# Altium PCB PCB3.PcbDoc
Units mm, origin at the board's own origin, x right, y up, seen from the top; angles counter-clockwise.
Board outline 63.5 x 33.5 mm, 2 copper layers (Top Layer, Bottom Layer); 44 components, 65 nets, 187 pads, 91 vias.
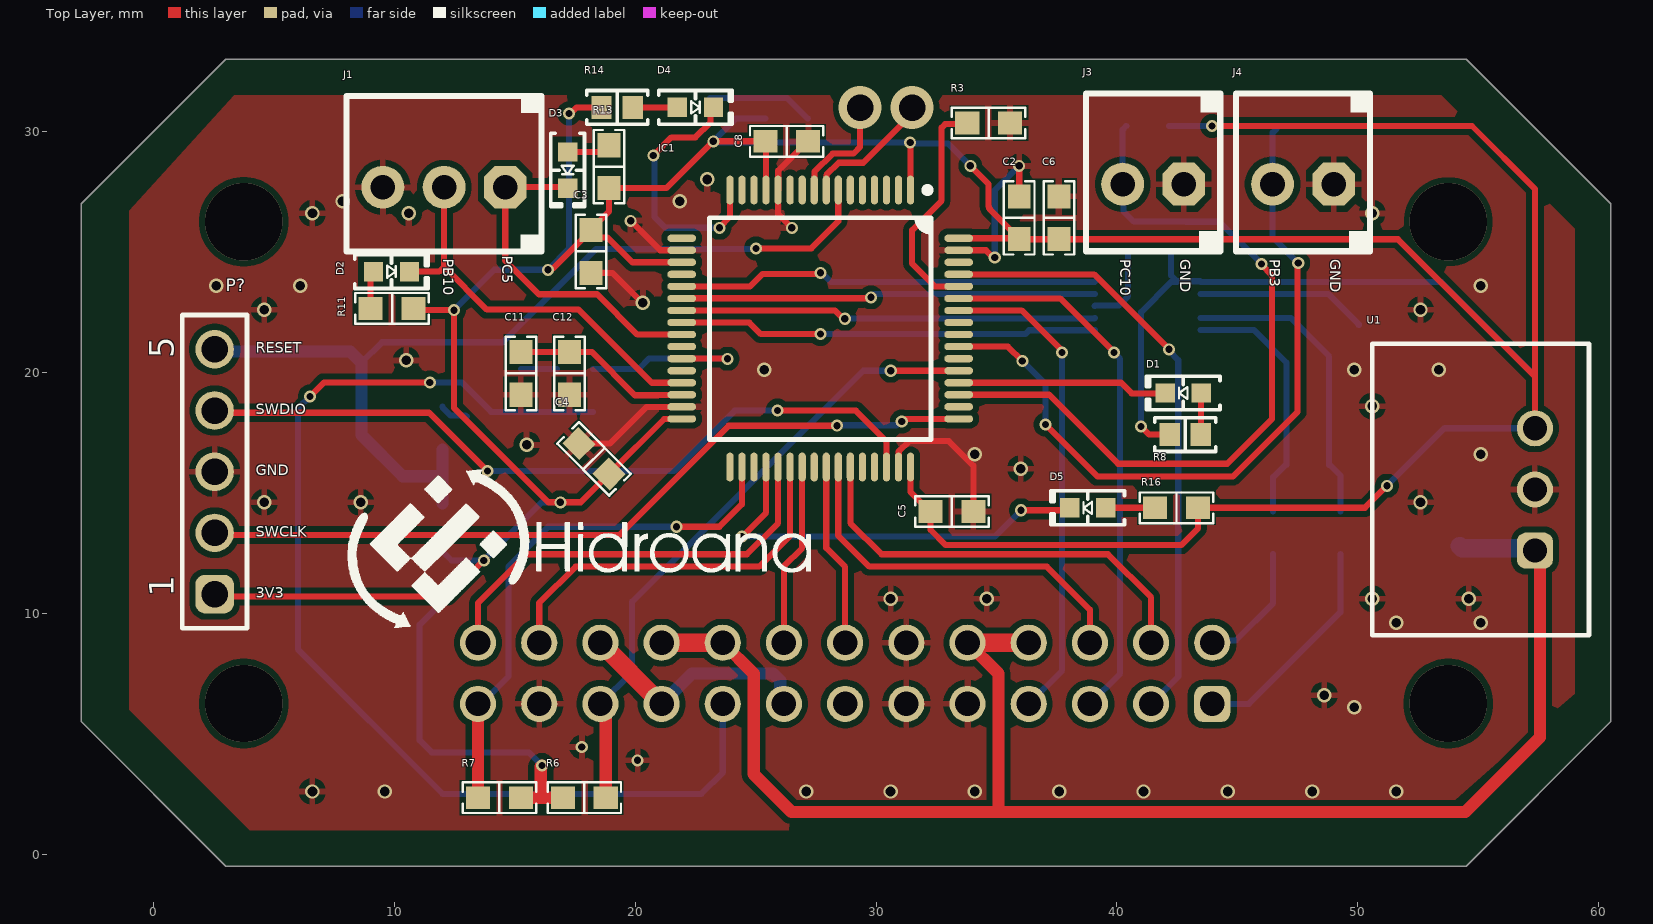
[diagram p0: Top Layer view]
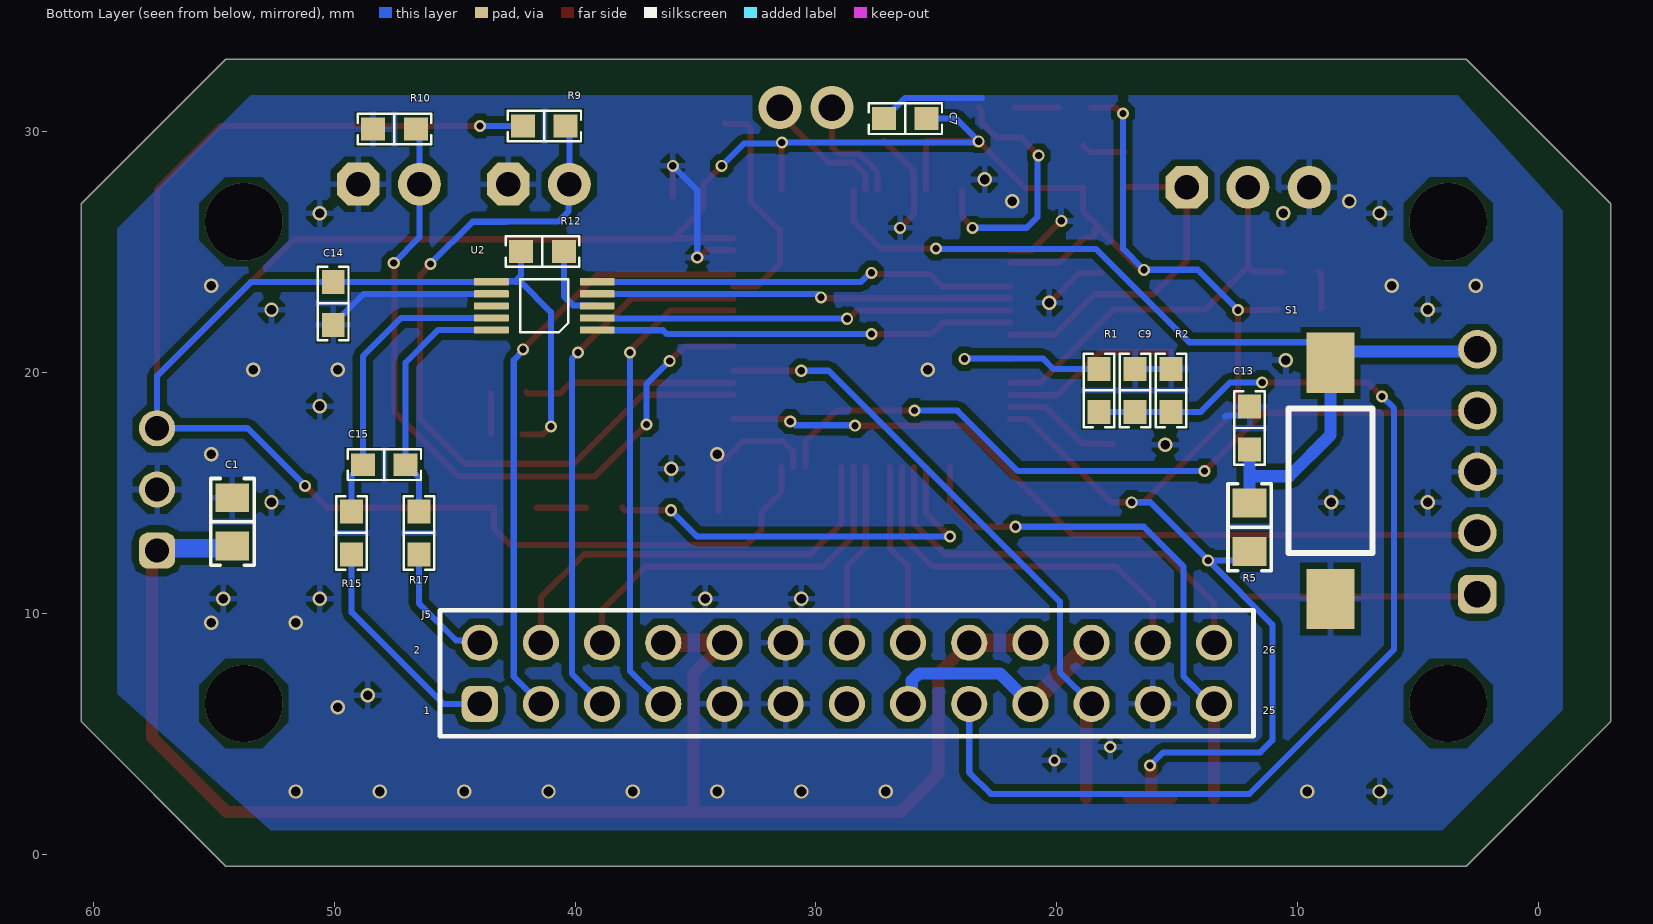
[diagram p1: Bottom Layer view, seen from below]
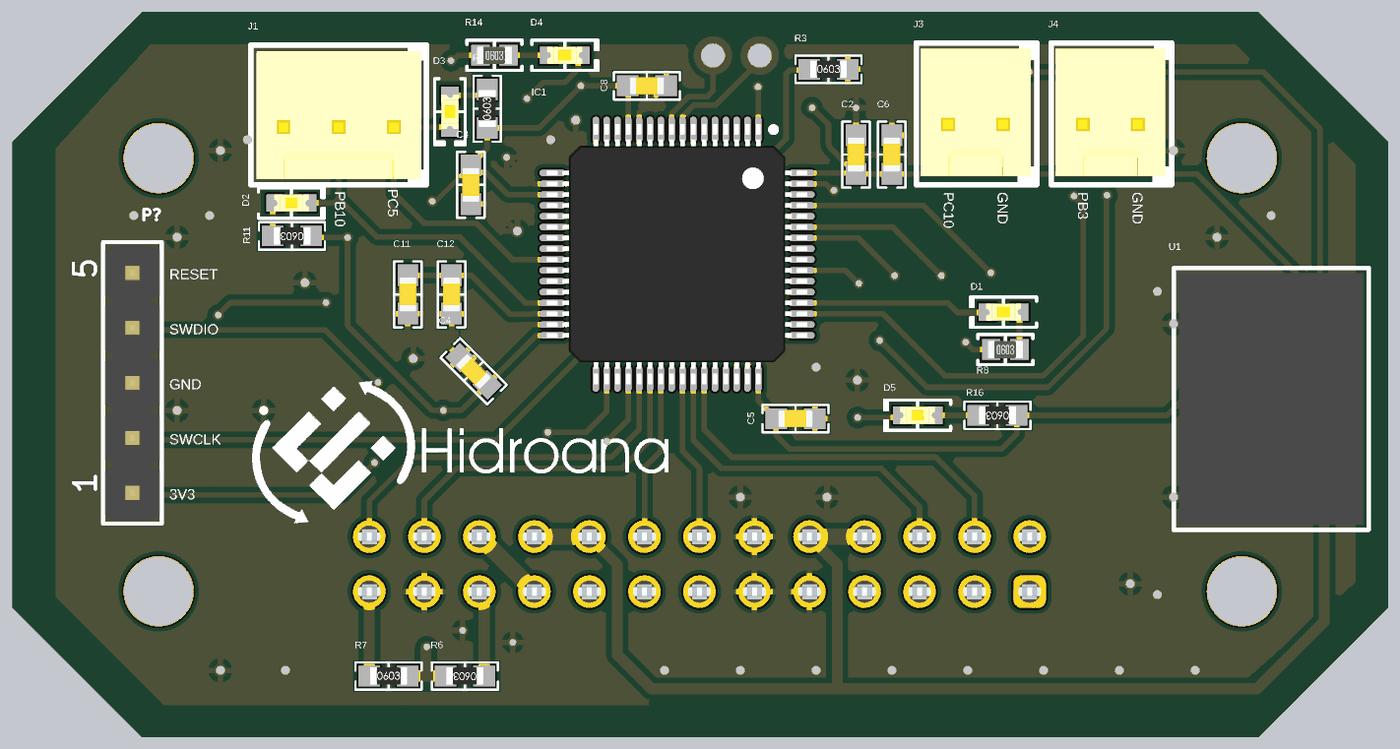
[diagram p2: 3D render of the assembled board from above, using the file's embedded part models]
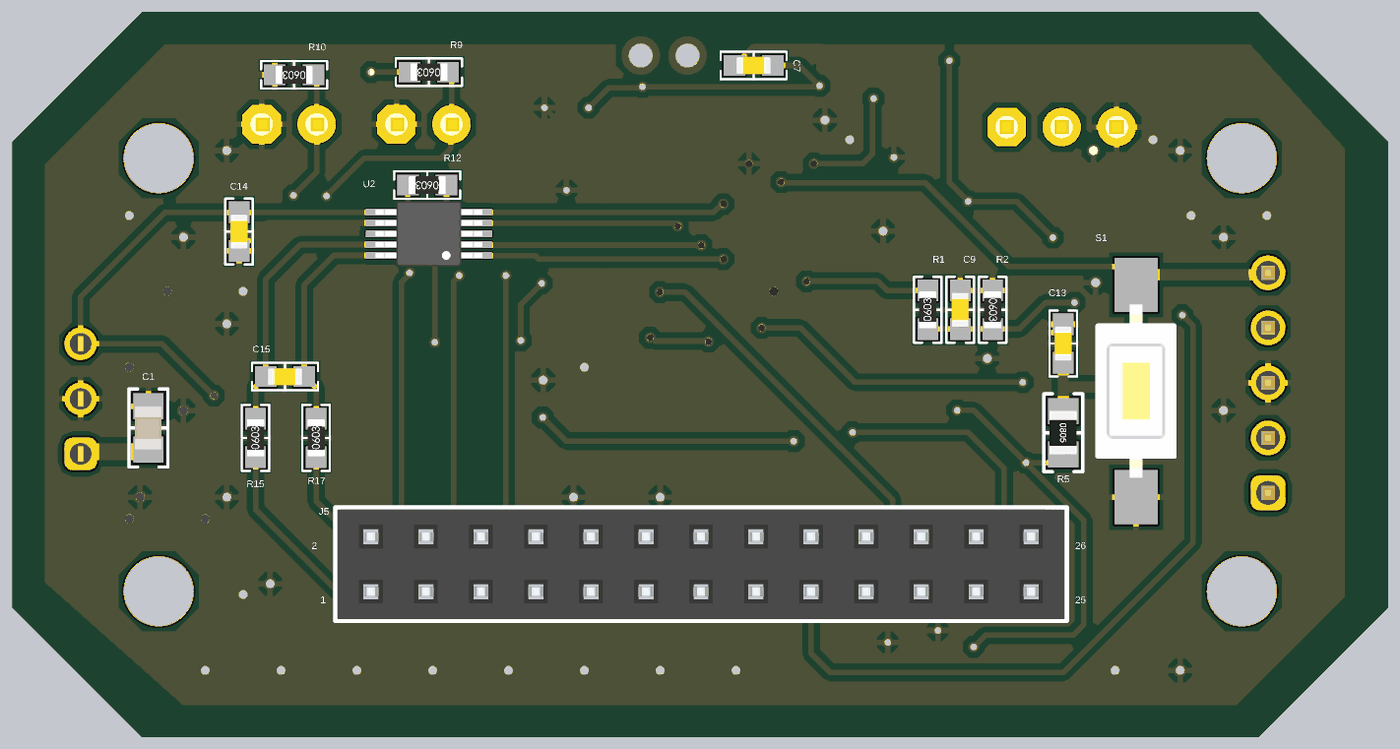
[diagram p3: 3D render of the assembled board from below, using the file's embedded part models]

## Layer stack, top to bottom
Top Solder: solder mask 0.0102, Solder Resist, Dk 3.5
Top Layer: signal copper 0.0356
Dielectric 1: dielectric 0.32, FR-4, Dk 4.8
Bottom Layer: signal copper 0.0356
Bottom Solder: solder mask 0.0102, Solder Resist, Dk 3.5

## Board outline
-3,5.5 -3,27 3,33 54.5,33 60.5,27 60.5,5.5 54.5,-0.5 3,-0.5

## Design rules (kind name [scope] priority, off if disabled: settings)
Clearance Clearance_1 [All] p1: gap=0.254 ignorepadtopadclearanceinfootprint=FALSE except(0: Arc-Hole Track-Hole SMDPad-Hole THPad-Hole Via-Hole Fill-Hole Poly-Hole Region-Hole Text-Hole; 0.127: Arc-Arc Arc-Track Arc-SMDPad Track-Track Track-SMDPad SMDPad-SMDPad)
Clearance [All] p2: gap=0.127 ignorepadtopadclearanceinfootprint=FALSE except(0: Arc-Hole Track-Hole SMDPad-Hole THPad-Hole Via-Hole Fill-Hole Poly-Hole Region-Hole Text-Hole)
PolygonConnect [All] p1: connectstyle=Relief reliefconductorwidth=0.254 reliefentries=4 polygonreliefangle="90 Angle" airgapwidth=0.254
RoutingVias [All] p1: holewidth=0.3 width=0.5 viastyle="Through Hole" minholewidth=0.25 minwidth=0.4 maxholewidth=0.5 maxwidth=1
SolderMaskExpansion [All] p1: expansion=0.102 istentingtop=FALSE
Width [All] p1: maxlimit=0.762 minlimit=0.254 preferedwidth=0.254 minimp=50.000000 maximp=50.000000 favimp=50.000000
30 further rules are at their usual default settings.

## Components (designator, comment, footprint, x,y, rotation, side; value= is the part's Value field where it differs from the comment)
C1 "100nF 16V" 0805_CAP 54.225,13.793 r270 bottom
C2 "4.7uF" 0603_CAP 35.941,26.416 r90 top value="1uF 16V"
C3 "100nF" 0603_CAP 18.161,25.019 r270 top value="1uF 16V"
C4 "100nF" 0603_CAP 18.288,16.411 r135 top value="1uF 16V"
C5 "100nF" 0603_CAP 33.147,14.224 r0 top value="1uF 16V"
C6 "100nF" 0603_CAP 37.592,26.416 r90 top value="1uF 16V"
C7 "10nF" 0603_CAP 26.289,30.531 r0 bottom value="1uF 16V"
C8 "1uF" 0603_CAP 26.289,29.591 r0 top value="1uF 16V"
C9 "10nF" 0603_CAP 16.75,19.25 r90 bottom value="100nF 16V"
C11 "2.2uF" 0603_CAP 15.252,19.957 r270 top value="1uF 16V"
C12 "2.2uF" 0603_CAP 17.272,19.957 r270 top value="1uF 16V"
C13 "100nF" 0603_CAP 11.995,17.69 r90 bottom value="1uF 16V"
C14 "100nF 16V" 0603_CAP 50.038,22.86 r90 bottom
C15 "100nF 16V" 0603_CAP 47.918,16.165 r0 bottom
D1 "Yellow" "LED 0603_1608 YELLOW" 42.75,19.141 r180 top
D2 "Yellow" "LED 0603_1608 YELLOW" 9.881,24.181 r0 top
D3 "Yellow" "LED 0603_1608 YELLOW" 17.196,28.397 r270 top
D4 "Yellow" "LED 0603_1608 YELLOW" 22.5,31 r0 top
D5 "Yellow" "LED 0603_1608 YELLOW" 38.786,14.376 r180 top
IC1 "STM32F446RET6" "ST LQFP-64 10X10MM" 27.68,21.818 r270 top
J1 "DS1070 3 Pin" 3pin_100mil 12.065,27.686 r180 top
J3 "DS1070 2 Pin" 2PIN_100mil 41.504,27.813 r180 top
J4 "DS1070 2 Pin" 2PIN_100mil 47.727,27.813 r180 top
J5 "61302621821" 61302621821 28.714,7.506 r180 bottom
P? "61300511121" 61300511121 2.54,15.875 r90 top
R1 "4.7K" 0603_RES 18.25,19.25 r90 bottom value="0/10 Ohms"
R2 "4.7K" 0603_RES 15.252,19.25 r270 bottom value="0/10 Ohms"
R3 "10K" 0603_RES 34.671,30.353 r0 top value="0/10 Ohms"
R5 "10k Ohms" 0805_RES 11.995,13.57 r270 bottom
R6 "4.7K" 0603_RES 17.886,2.34 r180 top value="0/10 Ohms"
R7 "4.7K" 0603_RES 14.363,2.34 r0 top value="0/10 Ohms"
R8 "10 kOhms" "RES 0603_1608" 42.835,17.414 r0 top
R9 "4.7K" 0603_RES 41.275,30.226 r0 bottom value="0/10 Ohms"
R10 "4.7K" 0603_RES 47.498,30.099 r0 bottom value="0/10 Ohms"
R11 "2k2" 0603_RES 9.906,22.657 r180 top value="0/10 Ohms"
R12 "10k Ohms" 0603_RES 41.353,25.011 r0 bottom
R13 "2k2" 0603_RES 18.917,28.536 r90 top value="0/10 Ohms"
R14 "10 kOhms" "RES 0603_1608" 19.25,31 r0 top
R15 "82 Ohms" 0603_RES 49.276,13.335 r90 bottom
R16 "2k2" 0603_RES 42.469,14.376 r180 top value="0/10 Ohms"
R17 "82 Ohms" 0603_RES 46.482,13.335 r90 bottom
S1 "DTSMF-31R-V-T/R" Button 8.636,15.494 r90 bottom
U1 "7-28Vin, 3.3Vout, 1Aout" WPME-FDSM_SIP-3_L11.6W8.5H10.5 55.1,15.137 r90 top
U2 "INA229" INA229 41.275,22.733 r0 bottom

## Footprints (in the part's own frame and the unit in brackets; to place one, negate y for a bottom-side part, rotate by r counter-clockwise, add the part's x,y. Pads: shape width x height; smd on the part's side, far side on the other; paste and mask are expansions set on the pad)
2PIN_100mil [mil]
  oct 70x70 hole 40.16 mask+1.97: 1(-50,0)
  round 70 hole 40.16 mask+1.97: 2(50,0)
  silkscreen extent -110,-148 110,110, body extent -98,-138 102,94, height 449
3pin_100mil [mil]
  oct 70x70 hole 40.16 mask+1.97: 1(-100,0)
  round 70 hole 40.16 mask+1.97: 2(0,0) 3(100,0)
  silkscreen extent -159,-151 160,108, body extent -150,-138 150,94, height 449
0603_CAP [mm]
  rect 1x0.95 smd mask+0.08: 1(-0.889,0) 2(0.889,0)
  silkscreen extent -1.52,-0.64 1.52,0.64, body extent -0.8,-0.4 0.8,0.4, height 0.96
0603_RES [mm]
  rect 1x0.95 smd mask+0.08: 1(-0.889,0) 2(0.889,0)
  silkscreen extent -1.52,-0.64 1.52,0.64, body extent -0.85,-0.4 0.85,0.4, height 0.56
0805_CAP [mm]
  rect 1.2x1.4 smd: 1(-1,0) 2(1,0)
  silkscreen extent -1.8,-0.9 1.8,0.9, body extent -1,-0.63 1,0.62, height 0.6
0805_RES [mm]
  rect 1.2x1.4 smd: 1(-1,0) 2(1,0)
  silkscreen extent -1.8,-0.9 1.8,0.9, body extent -1,-0.62 1,0.63, height 0.6
61300511121 [mm] "Pin Header, pitch 2.54 mm, THT, Vertical, single row, 5p"
  rrect50% 1.6x1.6 hole 1.1: 1(-5.08,0)
  round 1.6 hole 1.1: 2(-2.54,0) 3(0,0) 4(2.54,0) 5(5.08,0)
  silkscreen extent -6.5,-1.35 6.5,1.35, body extent -6.35,-1.27 6.35,1.27, height 8.57
61302621821 [mm] "Socket Header, Pitch 2.54 mm, THT, Vertical, dual row, 26p"
  rrect50% 1.5x1.5 hole 1.02: 1(-15.24,-1.27)
  round 1.5 hole 1.02: 2(-15.24,1.27) 3(-12.7,-1.27) 4(-12.7,1.27) 5(-10.16,-1.27) 6(-10.16,1.27) 7(-7.62,-1.27) 8(-7.62,1.27) 9(-5.08,-1.27) 10(-5.08,1.27) 11(-2.54,-1.27) 12(-2.54,1.27) 13(0,-1.27) 14(0,1.27) 15(2.54,-1.27) 16(2.54,1.27) 17(5.08,-1.27) 18(5.08,1.27) 19(7.62,-1.27) 20(7.62,1.27) 21(10.16,-1.27) 22(10.16,1.27) 23(12.7,-1.27) 24(12.7,1.27) 25(15.24,-1.27) 26(15.24,1.27)
  silkscreen extent -16.89,-2.62 16.89,2.62, body extent -16.76,-2.54 16.76,2.54, height 8.45
Button [mm] "SWITCH TACT 6.00x3.50 4.30mm 260gF SMT V/T"
  rect 2.5x2 smd mask+0.102: 1(-4.9,0) 2(4.9,0)
  silkscreen extent -3,-1.75 3,1.75, body extent -4,-1.75 4,1.75, height 2.6
INA229 [mm] "DGS0010A"
  rrect20% 1.45x0.3 smd mask+0.05: 1(-2.2,0.975) 2(-2.2,0.475) 3(-2.2,-0.025) 4(-2.2,-0.525) 5(-2.2,-1.025) 6(2.2,-1.025) 7(2.2,-0.525) 8(2.2,-0.025) 9(2.2,0.475) 10(2.2,0.975)
  silkscreen extent -1,-1.13 1,1.07, body extent -2.46,-1.53 2.46,1.47, height 1.1
"LED 0603_1608 YELLOW" [mm] "Chip Diode, 2-Leads, Body 1.60x0.80mm, IPC Medium Density"
  rect 0.8x0.8 smd: 1(-0.75,0) 2(0.75,0)
  silkscreen extent -1.52,-0.7 1.52,0.7, body extent -0.8,-0.4 0.8,0.4, height 0.53
"RES 0603_1608" [mm] "Chip Resistor, 2-Leads, Body 1.60x0.80mm, IPC Medium Density"
  rect 0.85x0.95 smd: 1(-0.65,0) 2(0.65,0)
  silkscreen extent -1.27,-0.7 1.27,0.7, body extent -0.8,-0.4 0.8,0.4, height 0.45
"ST LQFP-64 10X10MM" [mm] "LQFP, 64-Leads, Body 10.00x10.00mm, Pitch 0.50mm, IPC Medium Density"
  oval 1.2x0.3 smd: 1(-5.75,3.75) 2(-5.75,3.25) 3(-5.75,2.75) 4(-5.75,2.25) 5(-5.75,1.75) 6(-5.75,1.25) 7(-5.75,0.75) 8(-5.75,0.25) 9(-5.75,-0.25) 10(-5.75,-0.75) 11(-5.75,-1.25) 12(-5.75,-1.75) 13(-5.75,-2.25) 14(-5.75,-2.75) 15(-5.75,-3.25) 16(-5.75,-3.75) 33(5.75,-3.75) 34(5.75,-3.25) 35(5.75,-2.75) 36(5.75,-2.25) 37(5.75,-1.75) 38(5.75,-1.25) 39(5.75,-0.75) 40(5.75,-0.25) 41(5.75,0.25) 42(5.75,0.75) 43(5.75,1.25) 44(5.75,1.75) 45(5.75,2.25) 46(5.75,2.75) 47(5.75,3.25) 48(5.75,3.75)
  oval 0.3x1.2 smd: 17(-3.75,-5.75) 18(-3.25,-5.75) 19(-2.75,-5.75) 20(-2.25,-5.75) 21(-1.75,-5.75) 22(-1.25,-5.75) 23(-0.75,-5.75) 24(-0.25,-5.75) 25(0.25,-5.75) 26(0.75,-5.75) 27(1.25,-5.75) 28(1.75,-5.75) 29(2.25,-5.75) 30(2.75,-5.75) 31(3.25,-5.75) 32(3.75,-5.75) 49(3.75,5.75) 50(3.25,5.75) 51(2.75,5.75) 52(2.25,5.75) 53(1.75,5.75) 54(1.25,5.75) 55(0.75,5.75) 56(0.25,5.75) 57(-0.25,5.75) 58(-0.75,5.75) 59(-1.25,5.75) 60(-1.75,5.75) 61(-2.25,5.75) 62(-2.75,5.75) 63(-3.25,5.75) 64(-3.75,5.75)
  silkscreen extent -5.87,-4.6 4.6,4.6, body extent -6.01,-6.01 6.01,6.01, height 1.6
WPME-FDSM_SIP-3_L11.6W8.5H10.5 [mm] "Fixed Step Down Regulator Module, SIP-3, body 11.60x8.50mm"
  rrect50% 1.5x1.5 hole 1: 1(-2.54,-2.25)
  round 1.5 hole 1: 2(0,-2.25) 3(2.54,-2.25)
  silkscreen extent -6.05,-4.5 6.05,4.5, body extent -5.8,-4.26 5.8,4.25, height 10.55

## Part data
C1: library part CAP_0805
C2 C3 C4 C5 C6 C7 C8 C9 C11 C12 C13 C14 C15: library part CAP_0603, "CL10B105KO8NNNC - MLCC (1608) 0603 1uF 16VDC ±10% X7R"
D1 D2 D3 D4 D5: library part BL-HKC36D-AV-TRB, "0603 YELLOW", Current - Test=20mA, Device Package="0603 (1608 Metric)", Lens Color=Colorless, manufacturer="American Bright Optoelectronics Corporation", Millicandela Rating=120mcd, Supplier Device Package=0603, Supplier Part Number 1=BL-HKC36D-AV-TRBCT-ND, Voltage - Forward (Vf) (Typ)=2V, Color=Yellow, componentlink1description=Datasheet, componentlink1url=http://americanbrightled.com/pdffiles/smt/BL-HKC36D-AV-TRB.pdf, componentlink2description="DigiKey Link", componentlink2url=https://www.digikey.com/en/products/detail/american-bright-optoelectronics-corporation/BL-HKC36D-AV-TRB/9678175, Configuration=0603, Height (Max)=0.85mm, lastupdated="30.01.2024 21:34:20", Lens Size="0.87mm x 0.80mm", Lens Style="Rectangle with Flat Top", Lens Transparency=Clear, Lifecycle Status=Active, Minimum Order=1, Mounting Type="Surface Mount", Package / Case="0603 (1608 Metric)", packaging=TapeAndReel, Part Number=BL-HKC36D-AV-TRB, Part Status=Active, partid=82, price=0.04, series=-, Size / Dimension="1.60mm L x 0.80mm W", Supplier 1=DigiKey, Viewing Angle=120°, Wavelength - Dominant=589nm, Wavelength - Peak=590nm
IC1: "IC MCU 32BIT 512KB FLASH 64LQFP", manufacturer=STMicroelectronics, Operating Temperature="-40°C ~ 85°C (TA)", Package / Case=64-LQFP, Supplier Device Package="64-LQFP (10x10)", Supplier Part Number 1=497-15376-ND, Voltage - Supply (Vcc/Vdd)="1.7V ~ 3.6V", componentlink1description=Datasheet, componentlink1url=http://www.st.com/content/ccc/resource/technical/document/datasheet/65/cb/75/50/53/d6/48/24/DM00141306.pdf/files/DM00141306.pdf/jcr:content/translations/en.DM00141306.pdf, componentlink2description="DigiKey Link", componentlink2url=https://www.digikey.com/en/products/detail/stmicroelectronics/STM32F446RET6/5175962, Connectivity="CANbus, EBI/EMI, I²C, IrDA, LINbus, SAI, SD, SPDIF-Rx, SPI, UART/USART, USB, USB OTG", Core Processor="ARM® Cortex®-M4", Core Size="32-Bit Single-Core", Data Converters="A/D 16x12b; D/A 2x12b", lastupdated="27.01.2024 21:31:11", Lifecycle Status=Active, Minimum Order=1, Mounting Type="Surface Mount", Number of I/O=50, Oscillator Type=Internal, packaging=Tray, Part Number=STM32F446RET6, Part Status=Active, partid=121, Peripherals="Brown-out Detect/Reset, DMA, I²S, LVD, POR, PWM, WDT", price=6.95, Program Memory Size="512KB (512K x 8)", Program Memory Type=FLASH, RAM Size="128K x 8", series=STM32F4, Speed=180MHz, Supplier 1=DigiKey
J1: library part "3 Pin Socket", "3 Pin 100mm Connector", componentlink1description=Özdisan, componentlink1url=https://www.ozdisan.com/konnektor-ve-baglanti-elemanlari/konnektor-cesitleri/pcb-konnektorler/DS1070-3MVV6, Part="DS1070 3 Pin"
J3 J4: library part "2 Pin Socket", "2pin Socket 100mil"
J5: "WR-PHD Socket Header, THT, Vertical, pitch 2.54mm, 2 Row, 26P", Contact Resistance=20mΩ, manufacturer="Wurth Elektronik", Operating Temperature Max=125°C, Operating Temperature Min=-40°C, Rated Current=3A, Withstanding Voltage=500V, Working Voltage=250V, Category="Board-to-Board Connectors", componentlink1description="Website Link", componentlink1url=https://www.we-online.com/redexpert/article/61302621821?ad, componentlink2description="Datasheet Link", componentlink2url=https://www.we-online.com/redexpert/spec/61302621821?ad, Gender="Socket Header", Manufacturer Part Number=61302621821, Match Code=WR-PHD, Mount="Through Hole", Number of Pins=26, Number of Rows=2, Orientation=Vertical, packaging=Tray, Pitch=2.54mm
P?: "WR-PHD Pin Header, THT, Vertical, pitch 2.54mm, 1 Row, 5P", Contact Resistance=20mΩ, manufacturer="Wurth Elektronik", Operating Temperature Max=105°C, Operating Temperature Min=-40°C, Rated Current=3A, Withstanding Voltage=500V, Working Voltage=250V, Category="Board-to-Board Connectors", componentlink1description="Website Link", componentlink1url=https://www.we-online.com/redexpert/article/61300511121?ad, componentlink2description="Datasheet Link", componentlink2url=https://www.we-online.com/redexpert/spec/61300511121?ad, Gender="Pin Header", Manufacturer Part Number=61300511121, Match Code=WR-PHD, Mount="Through Hole", Number of Pins=5, Number of Rows=1, Orientation=Vertical, packaging=Bag, Pitch=2.54mm
R1 R2 R3 R6 R7 R9 R10 R11 R12 R13 R15 R16 R17: library part RES_0603, "0603", Power=1/8W
R5: library part RES_0805, "0805", Power="1/8 W"
R8 R14: library part RNCS0603BKE10K0, "RES 10K OHM 0.1% 1/16W 0603", Device Package="0603 (1608 Metric)", manufacturer="Stackpole Electronics Inc", Operating Temperature="-55°C ~ 155°C", Power (Watts)="0.063W, 1/16W", Ratings=AEC-Q200, Supplier Device Package=0603, Supplier Part Number 1=RNCS0603BKE10K0CT-ND, Temperature Coefficient=±25ppm/°C, Tolerance=±0.1%, componentlink1description=Datasheet, componentlink1url=https://www.seielect.com/catalog/sei-rncs_rnch.pdf, componentlink2description="DigiKey Link", componentlink2url=https://www.digikey.com/en/products/detail/stackpole-electronics-inc/RNCS0603BKE10K0/1708836, Composition="Thin Film", Features="Anti-Corrosive, Automotive AEC-Q200, Moisture Resistant", Height - Seated (Max)="0.022\" (0.55mm)", lastupdated="28.01.2024 20:40:01", Lifecycle Status=Active, Minimum Order=1, Number of Terminations=2, Package / Case="0603 (1608 Metric)", packaging=TapeAndReel, Part Number=RNCS0603BKE10K0, Part Status=Active, partid=4838, price=0.06, Resistance="10 kOhms", series=RNCS, Size / Dimension="0.061\" L x 0.031\" W (1.55mm x 0.80mm)", Supplier 1=DigiKey
S1: "DTSMF-31R-V-T/R - SWITCH TACT 6.00x3.50 4.30mm 260gF SMT V/T", componentlink1description=özdisan, componentlink1url=https://ozdisan.com/elektromekanik-komponentler/sivicler-ve-anahtarlar/tact-sivicler/DTSMF-31R-V-TR
U1: library part 173010378, "WPME-FDSM Fixed Step Down Regulator Module, THT, SIP-3, 7-28Vin, 3.3Vout, 1Aout", Case/Size Code=SIP-3, manufacturer="Wurth Elektronik", Operating Temperature Max=85°C, Operating Temperature Min=-40°C, Output Current=1A, Output Voltage=3.3V, Input Voltage Max=28V, Input Voltage Min=7V, Category="Step Down Converter", componentlink1description="Website Link", componentlink1url=https://www.we-online.com/redexpert/article/173010378?ad, componentlink2description="Datasheet Link", componentlink2url=https://www.we-online.com/redexpert/spec/173010378?ad, Height=10.5mm, Length=11.6mm, Manufacturer Part Number=173010378, Match Code=WPME-FDSM, Mount="Through Hole", packaging=Tube, Width=8.5mm

## Via types
v1: diameter 0.5, hole 0.3, Top Layer to Bottom Layer, tented both sides, 43 vias
v2: diameter 0.6, hole 0.4, Top Layer to Bottom Layer, tented both sides, 42 vias
v3: diameter 3.2, hole 3.2, Top Layer to Bottom Layer, 4 vias
v4: diameter 1.778, hole 1.092, Top Layer to Bottom Layer, tented both sides, 2 vias

## Nets (pads, with @x,y where several pads share a name; then routed paths per layer and width w, separated by ;. In a path a pad name is that pad's centre, name@x,y a point inside that pad or via, vN(x,y) a via of type N, cw(c..) or ccw(c..) an arc to the next point about the centre after c; other vN are vias at no path point)
+3V3: C2.1 C3.1 C4.1 C5.1 C6.1 C7.1 C8.1 C14.2 IC1.1 IC1.13 IC1.19 IC1.32 IC1.48 IC1.64 P?.1 R5.2 R6.2 R7.2 R8.1 R9.2 R11.1 R12.2 R13.1 R14.1 R16.1 U1.3 U2.6 | length 215.5
  Top Layer w0.254: P?.1 2.633,10.702 12.226,10.702 v1(13.716,12.192) ; R11.1 10.871,22.581 v1(12.471,22.581) 12.471,18.529 16.395,14.605 17.74,14.605 C4.1 21.194,18.059 21.922,18.059 IC1.32 ; v1(16.383,24.257) 16.43,24.304 16.582,24.304 18.161,25.883 C3.1 ; v1(17.25,30.75) 17.317,30.75 17.567,31 R14.1 ; IC1.19 19.882,24.568 18.854,25.596 18.509,25.596 18.437,25.668 18.437,25.908 C3.1 ; IC1.13 25.43,29.561 C8.1 v1(23.241,29.591) 21.297,27.647 R13.1 18.917,26.689 18.161,25.933 C3.1 ; v1(31.416,29.544) 31.416,29.37 31.43,29.356 IC1.1 ; IC1.48 31.43,15.027 C5.1@32.246,14.211 ; C5.1 32.258,13.462 32.893,12.827 42.672,12.827 43.358,13.513 R16.1 50.292,14.376 v1(51.206,15.291) ; IC1.64 35.9,25.568 C2.1 ; v1(33.909,28.575) 33.911,28.575 34.671,27.815 34.671,26.927 ccw(c34.925,26.927) 34.745,26.748 35.941,25.552 C2.1 ; v1(41,17.75) 41.336,17.414 R8.1 ; v1(43.942,30.226) 54.737,30.226 57.35,27.613 57.35,19.841 ; U1.3 57.35,19.841 ; C2.1 C6.1 51.664,25.527 57.35,19.841
  Top Layer w0.508: R7.2 16.066,2.34 16.082,2.356 16.082,3.636 v1(16.129,3.683) ; 16.082,2.34 R6.2
  Bottom Layer w0.254: R5.2 12.373,12.192 v1(13.716,12.192) ; v1(12.471,22.581) 14.148,24.257 v1(16.383,24.257) 17.25,25.124 v1(17.25,30.75) ; v1(16.129,3.683) 15.587,4.225 11.544,4.225 11.049,4.721 11.049,9.525 v1(13.716,12.192) ; v1(16.891,14.605) 16.129,14.605 v1(13.716,12.192) ; C7.1 24.181,30.531 v1(23.241,29.591) ccw(c23.388,29.798) 23.387,29.544 v1(31.416,29.544) 31.463,29.497 32.987,29.497 v1(33.909,28.575) ; v1(41,17.75) 41,22.5 42.258,23.758 42.485,23.758 ; R9.2 v1(43.942,30.226) ; R12.2 42.242,24.025 42.485,23.781 43.452,23.781 U2.6 43.484,23.749 C14.2 53.467,23.749 57.35,19.866 U1.3 53.593,17.677 v1(51.206,15.291)
+5: J5.15 J5.19 J5.22 | length 10.2
  Top Layer w0.762: J5.22 J5.19
  Bottom Layer w0.508: J5.19 22.358,7.5 25.721,7.5 26.018,7.202 26.018,6.392 J5.15
+15: C1.2 J5.8 J5.10 J5.18 J5.20 U1.1 | length 64.2
  Top Layer w0.508: J5.18 24.916,7.494 24.916,3.329 26.492,1.753 35.077,1.753 ; J5.10 35.076,7.494 35.076,1.754 35.077,1.753 ; U1.1 57.556,12.391 57.556,4.851 54.458,1.753 35.077,1.753
  Top Layer w0.762: J5.20 J5.18 ; J5.10 J5.8
  Bottom Layer w0.762: C1.2 54.323,12.695 57.252,12.695 U1.1
ALERT: R12.1 U2.3 | length 3.4
  Bottom Layer w0.254: U2.3 39.098,22.781 40.082,22.781 40.464,23.163 R12.1
COUT_N: J5.1 R15.1 | length 9.3
  Bottom Layer w0.254: J5.1 45.479,6.236 49.276,10.033 R15.1
COUT_P: J5.2 R17.1 | length 5.2
  Bottom Layer w0.254: J5.2 44.046,8.868 44.936,8.868 46.482,10.414 R17.1
CS: IC1.24 U2.1 | length 17.4
  Top Layer w0.254: IC1.24 24.735,22.068 25.213,21.59 v1(27.686,21.59)
  Bottom Layer w0.254: v1(27.686,21.59) 36.195,21.59 36.354,21.749 39.066,21.749 U2.1
ENABLE: IC1.53 J5.21 R6.1 | length 26.3
  Top Layer w0.254: v1(30.607,20.066) v1(30.607,20.066) 33.429,20.067 IC1.53
  Top Layer w0.508: J5.21 18.554,5.968 18.775,5.747 R6.1
  Bottom Layer w0.254: J5.21 19.874,7.556 19.874,10.476 29.464,20.066 v1(30.607,20.066)
FWD/REV: IC1.34 J5.25 R7.1 | length 22.5
  Top Layer w0.254: v1(21.717,13.589) 23.495,13.589 24.43,14.524 IC1.34
  Top Layer w0.508: R7.1 J5.25
  Bottom Layer w0.254: J5.25 13.602,6.236 14.732,7.366 14.732,11.938 16.383,13.589 v1(21.717,13.589)
GND: C1.1 C2.2 C3.2 C4.2 C5.2 C6.2 C7.2 C8.2 C9.2 C11.2 C12.2 C13.2 C14.1 IC1.12 IC1.18 IC1.31 IC1.47 IC1.63 J1.3 J3.1 J4.1 J5.9 J5.11 J5.12 J5.23 P?.3 R2.1 R3.2 R10.2 S1.1 U1.2 U2.7 | length 42.2
  Top Layer w0.254: C4.2 17.677,17.022 18.169,17.022 18.187,17.039 18.944,17.039 20.473,18.568 IC1.31 ; C3.2 19.05,24.13 v2@20.32,22.86 ; v1(19.812,26.289) 21.033,25.068 IC1.18 ; v1(26.5,26) 25.93,26.57 IC1.12 25.939,27.577 25.939,28.377 27.153,29.591 C8.2 ; IC1.47 30.939,16.077 30.939,16.715 31.369,17.145 33.02,17.145 34.036,16.129 C5.2 ; IC1.63 34.555,25.068 34.858,24.765 v1(34.925,24.765) ; C2.2 v1(35.941,28.575)
  Bottom Layer w0.254: C13.2 11.995,18.554 12.343,18.206 12.96,18.206 13.005,18.161 ; R2.1 C9.2 ; 23.106,31.394 26.289,31.394 27.153,30.531 C7.2 ; v1(34.925,24.765) 34.925,27.559 v1(35.941,28.575) ; U2.7 48.776,23.258 50.038,21.996 C14.1
  other v1: 20.098,3.893 17.78,4.445
  other v2: 6.6,2.6 9.6,2.6 27.1,2.6 30.6,2.6 34.1,2.6 37.6,2.6 41.1,2.6 44.6,2.6 48.1,2.6 51.6,2.6 49.85,6.1 48.6,6.6 51.6,9.6 55.1,9.6 30.6,10.6 34.6,10.6 50.6,10.6 54.6,10.6 4.6,14.6 8.6,14.6 52.6,14.6 36,16 34.1,16.6 55.1,16.6 15.5,17 50.6,18.6 25.35,20.1 49.85,20.1 53.35,20.1 10.5,20.5 4.6,22.6 52.6,22.6 20.307,22.885 2.6,23.6 6.1,23.6 55.1,23.6 6.6,26.6 10.6,26.6 50.6,26.6 7.85,27.1 21.85,27.1 22.997,28.007
HA: IC1.58 J5.7 | length 20.2
  Top Layer w0.254: IC1.58 36.039,22.568 37.719,20.888 v1(37.719,20.828)
  Bottom Layer w0.254: J5.7 37.719,7.621 v1(37.719,20.828)
HB: IC1.59 J5.5 | length 22.6
  Top Layer w0.254: IC1.59 37.638,23.068 v1(39.878,20.828)
  Bottom Layer w0.254: J5.5 40.132,7.494 40.132,20.556 39.878,20.81 v1(39.878,20.828)
HC: IC1.61 J5.3 | length 25.4
  Top Layer w0.254: IC1.61 39.051,24.068 v1(42.164,20.955)
  Bottom Layer w0.254: J5.3 42.545,7.367 42.545,20.507 42.164,20.888 v1(42.164,20.955)
IN+: C15.1 R17.2 U2.10 | length 10.5
  Bottom Layer w0.254: U2.10 45.679,21.758 47.029,20.408 C15.1 47.004,16.165 46.482,15.643 R17.2
IN-: C15.2 R15.2 U2.9 | length 12.6
  Bottom Layer w0.254: U2.9 47.211,22.258 48.807,20.662 C15.2 48.832,16.165 49.276,15.721 R15.2
MISO: IC1.22 U2.4 | length 17.2
  Top Layer w0.254: IC1.22 21.939,23.077 29.748,23.077 v1(29.785,23.114)
  Bottom Layer w0.254: v1(29.785,23.114) 29.92,23.249 39.066,23.249 U2.4
MOSI: IC1.23 U2.2 | length 17.3
  Top Layer w0.254: IC1.23 28.292,22.568 28.635,22.225 v1(28.702,22.225)
  Bottom Layer w0.254: v1(28.702,22.225) 28.714,22.237 39.054,22.237 U2.2
NetC11_1: C11.1 C12.1 IC1.30 | length 7.4
  Top Layer w0.254: C11.1 C12.1 18.194,20.846 19.99,19.05 20.942,19.05 20.951,19.059 21.922,19.059 IC1.30
NetD1_1: D1.1 R8.2 | length 1.7
  Top Layer w0.254: R8.2 43.485,19.126 D1.1
NetD2_1: D2.1 R11.2 | length 1.6
  Top Layer w0.254: R11.2 9.017,24.067 D2.1
NetD3_1: D3.1 R13.2 | length 1.8
  Top Layer w0.254: D3.1 18.639,29.147 R13.2
NetD4_1: D4.1 R14.2 | length 1.9
  Top Layer w0.254: R14.2 D4.1
NetD5_1: D5.1 R16.2 | length 2
  Top Layer w0.254: D5.1 R16.2
NetR3_1: IC1.60 R3.1 | length 9.6
  Top Layer w0.254: IC1.60 32.439,23.568 31.496,24.511 31.496,25.908 32.715,27.127 32.715,30.158 32.864,30.307 33.736,30.307 R3.1
PA0: IC1.14
PA1: IC1.15
PA2: D4.2 IC1.16 | length 10.8
  Top Layer w0.254: v1(20.75,29) 21.5,29.75 22.5,29.75 23.118,30.368 23.118,30.868 D4.2 ; v1(23.5,26) 23.5,26.032 23.93,26.462 IC1.16
  Bottom Layer w0.254: v1(20.75,29) 20.797,28.953 20.797,26.453 21.25,26 v1(23.5,26)
PA3: IC1.17
PA4: IC1.20
PA5: IC1.21 U2.5 | length 17.5
  Top Layer w0.254: IC1.21 24.772,23.568 25.286,24.083 27.639,24.083 v1(27.686,24.13)
  Bottom Layer w0.254: v1(27.686,24.13) 27.753,24.13 28.134,23.749 39.066,23.749 U2.5
PA11: IC1.44
PA12: IC1.45
PA15: IC1.50
PB0: IC1.26
PB1: IC1.27 R1.2 | length 7.7
  Top Layer w0.254: IC1.27 23.83,20.568 v1(23.836,20.563)
  Bottom Layer w0.254: R1.2 20.139,20.139 20.578,20.578 23.821,20.578 v1(23.836,20.563)
PB2: IC1.28
PB3: IC1.55 J4.2 R10.1 | length 30.7
  Top Layer w0.254: IC1.55 35.472,21.068 v1(36.068,20.472) ; v1(37.033,17.831) 39.192,15.672 44.806,15.672 47.498,18.364 47.498,24.511 v1(47.523,24.536)
  Bottom Layer w0.254: v1(36.068,20.472) 37.033,19.507 v1(37.033,17.831) ; R10.1 46.457,29.947 J4.2 46.457,25.603 v1(47.523,24.536)
PB4: IC1.56
PB5: IC1.57
PB9: IC1.62
PB10: D2.2 IC1.29 J1.2 | length 16.7
  Top Layer w0.254: D2.2 11.862,24.181 12.065,24.384 ; J1.2 12.065,24.384 ; IC1.29 20.691,19.568 17.653,22.606 13.843,22.606 12.065,24.384
PB12: IC1.33
PB14: IC1.35
PB15: D5.2 IC1.36 | length 17.4
  Top Layer w0.254: v1(24.435,13.183) 25.43,14.178 IC1.36 ; v1(36.017,14.275) 37.934,14.275 D5.2
  Bottom Layer w0.254: v1(24.435,13.183) 34.925,13.183 v1(36.017,14.275)
PC0: IC1.8 | length 5.5
  Top Layer w0.254: IC1.8 27.939,27.577 27.939,28.193 28.448,28.702 29.464,28.702 31.496,30.734 v4(31.496,30.988)
PC1: IC1.9 | length 4.7
  Top Layer w0.254: IC1.9 27.439,27.577 27.439,28.328 28.194,29.083 29.061,29.083 29.337,29.359 v4(29.337,30.988)
PC2: IC1.10
PC3: IC1.11
PC5: D3.2 IC1.25 J1.1 | length 14.3
  Top Layer w0.254: D3.2 17.157,27.686 J1.1 14.605,24.638 16.002,23.241 18.415,23.241 20.088,21.568 IC1.25
PC9: IC1.40
PC10: IC1.51 J3.2 R9.1 | length 31.8
  Top Layer w0.254: IC1.51 37.182,19.068 40.045,16.205 44.577,16.205 46.431,18.059 46.431,24.039 46,24.47 v1(46,24.5)
  Bottom Layer w0.254: R9.1 40.234,30.074 J3.2 40.264,27.783 40.264,26.692 40.701,26.255 42.833,26.255 42.838,26.25 44.25,26.25 v1(46,24.5)
PC11: D1.2 IC1.52 | length 8.8
  Top Layer w0.254: IC1.52 40.173,19.568 40.615,19.126 41.959,19.126 D1.2@42.01,19.177
PC13: IC1.2
PD2: IC1.54
PWM_AH: IC1.37 J5.26 | length 17.8
  Top Layer w0.254: J5.26 13.474,10.426 15.494,12.446 24.638,12.446 25.93,13.738 IC1.37
PWM_AL: IC1.38 J5.24 | length 16.1
  Top Layer w0.254: J5.24 16.014,10.426 17.526,11.938 25.146,11.938 26.43,13.222 IC1.38
PWM_BH: IC1.39 J5.16 | length 7.6
  Top Layer w0.254: J5.16 26.174,11.95 26.924,12.7 26.924,16.062 IC1.39
PWM_BL: IC1.41 J5.14 | length 7.6
  Top Layer w0.254: IC1.41 27.93,12.71 28.714,11.926 J5.14
PWM_CH: IC1.42 J5.6 | length 15.9
  Top Layer w0.254: IC1.42 28.43,13.226 29.718,11.938 37.084,11.938 38.874,10.148 J5.6
PWM_CL: IC1.43 J5.4 | length 18
  Top Layer w0.254: IC1.43 28.93,13.742 30.226,12.446 39.624,12.446 41.414,10.656 J5.4
REFOUT: J5.13
RESET: C13.1 IC1.7 P?.5 R5.1 S1.2 | length 39.1
  Top Layer w0.254: v1(25.019,25.146) 27.305,25.146 28.43,26.271 IC1.7
  Bottom Layer w0.254: S1.2 9.492,21.25 14.5,21.25 18.369,25.119 24.992,25.119 v1(25.019,25.146)
  Bottom Layer w0.508: P?.5 2.633,20.862 8.168,20.862 S1.2 8.636,17.399 10.349,15.686 11.995,15.686 ; R5.1 11.995,15.686 ; C13.1 11.995,15.686
SPEED: C9.1 J5.17 R1.1 R2.2 | length 46.5
  Top Layer w0.254: v1(6.5,19) 7.081,19.581 v1(11.473,19.581)
  Bottom Layer w0.254: v1(6.5,19) 6,18.5 6,8.5 12,2.5 22.75,2.5 23.634,3.384 J5.17 ; v1(11.473,19.581) 12.798,19.581 14.018,18.361 R2.2 C9.1 R1.1
SWCLK: IC1.49 P?.2 | length 32.9
  Top Layer w0.254: P?.2 2.633,13.242 19.338,13.242 23.88,17.784 v1(28.372,17.784) ; v1(31.064,17.958) 31.131,17.958 31.241,18.068 IC1.49
  Bottom Layer w0.254: v1(28.372,17.784) 28.393,17.805 30.845,17.805 30.998,17.958 v1(31.064,17.958)
SWDIO: IC1.46 P?.4 | length 31.6
  Top Layer w0.254: P?.4 2.633,18.322 11.447,18.322 v1(13.868,15.9) ; v1(25.908,18.415) 29.159,18.415 30.43,17.144 IC1.46
  Bottom Layer w0.254: v1(13.868,15.9) 21.615,15.9 24.13,18.415 v1(25.908,18.415)
pads on no net: IC1.3 IC1.4 IC1.5 IC1.6 U2.8
copper on no net:
  other v3: 3.75,6.25 53.75,6.25 3.75,26.25 53.75,26.25

## Polygon pours and split planes (outlines as drawn)
GND on Top Layer "GND_L01_P000" (solid, remove dead copper, pour order 0): -1,26.7 3.364,31.5 53.463,31.5 59,25.963 59,6.667 52.625,1 4,1 -1,6
GND on Bottom Layer "GND_L02_P002" (solid, remove dead copper, pour order 2): -1,26.7 3.364,31.5 53.463,31.5 59,25.963 59,6.667 52.625,1 4,1 -1,6

## Silkscreen, mask and mechanical layers (free items; w line width, h text height)
Top Overlay:
  drawing of 15 lines, arcs and shapes, not listed
  text "PC5" at 14.334,24.841 h0.76 r270
  text "PB10" at 11.896,24.714 h0.76 r270
  text "PC10" at 39.988,24.689 h0.76 r270
  text "GND" at 42.477,24.689 h0.76 r270
  text "PB3" at 46.186,24.689 h0.76 r270
  text "GND" at 48.7,24.689 h0.76 r270
  text "RESET" at 4.242,20.659 h0.76
  text "SWDIO" at 4.242,18.119 h0.76
  text "GND" at 4.242,15.579 h0.76
  text "SWCLK" at 4.242,13.039 h0.76
  text "3V3" at 4.242,10.499 h0.76

## Text inside footprints (layer, text, board x,y; h text height)
J5: Bottom Overlay "25" at 11.444,5.706 h0.51; Bottom Overlay "26" at 11.444,8.206 h0.51; Bottom Overlay "1" at 46.284,5.706 h0.51; Bottom Overlay "2" at 46.684,8.206 h0.51
P?: Top Overlay "1" at 0.84,10.675 h1.02 r90; Top Overlay "5" at 0.84,20.575 h1.02 r90